# Altium PCB X4M03.PcbDoc
Units mm, origin at the board's own origin, x right, y up, seen from the top; angles counter-clockwise.
Board outline 57.5 x 29.5 mm, 8 copper layers (Top Layer, Inner1, Inner2, Inner3, Inner4, Inner5, Inner6, Bottom Layer), stack 1.684 mm thick; 8 components, 0 nets, 0 pads, 0 vias.
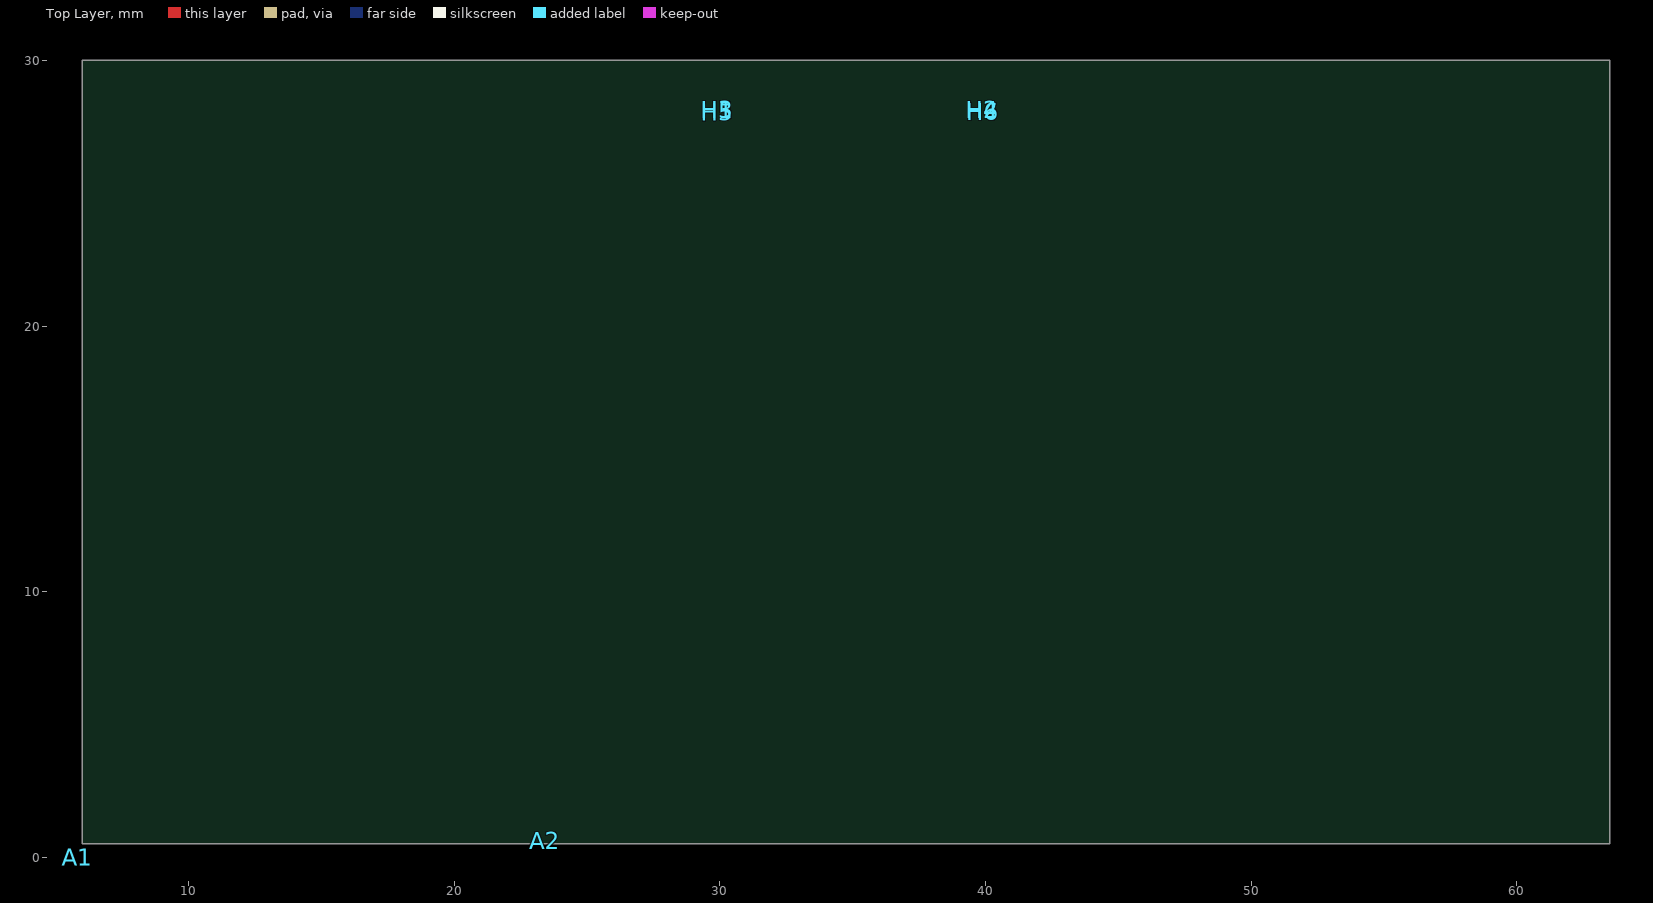
[diagram p0: Top Layer view]
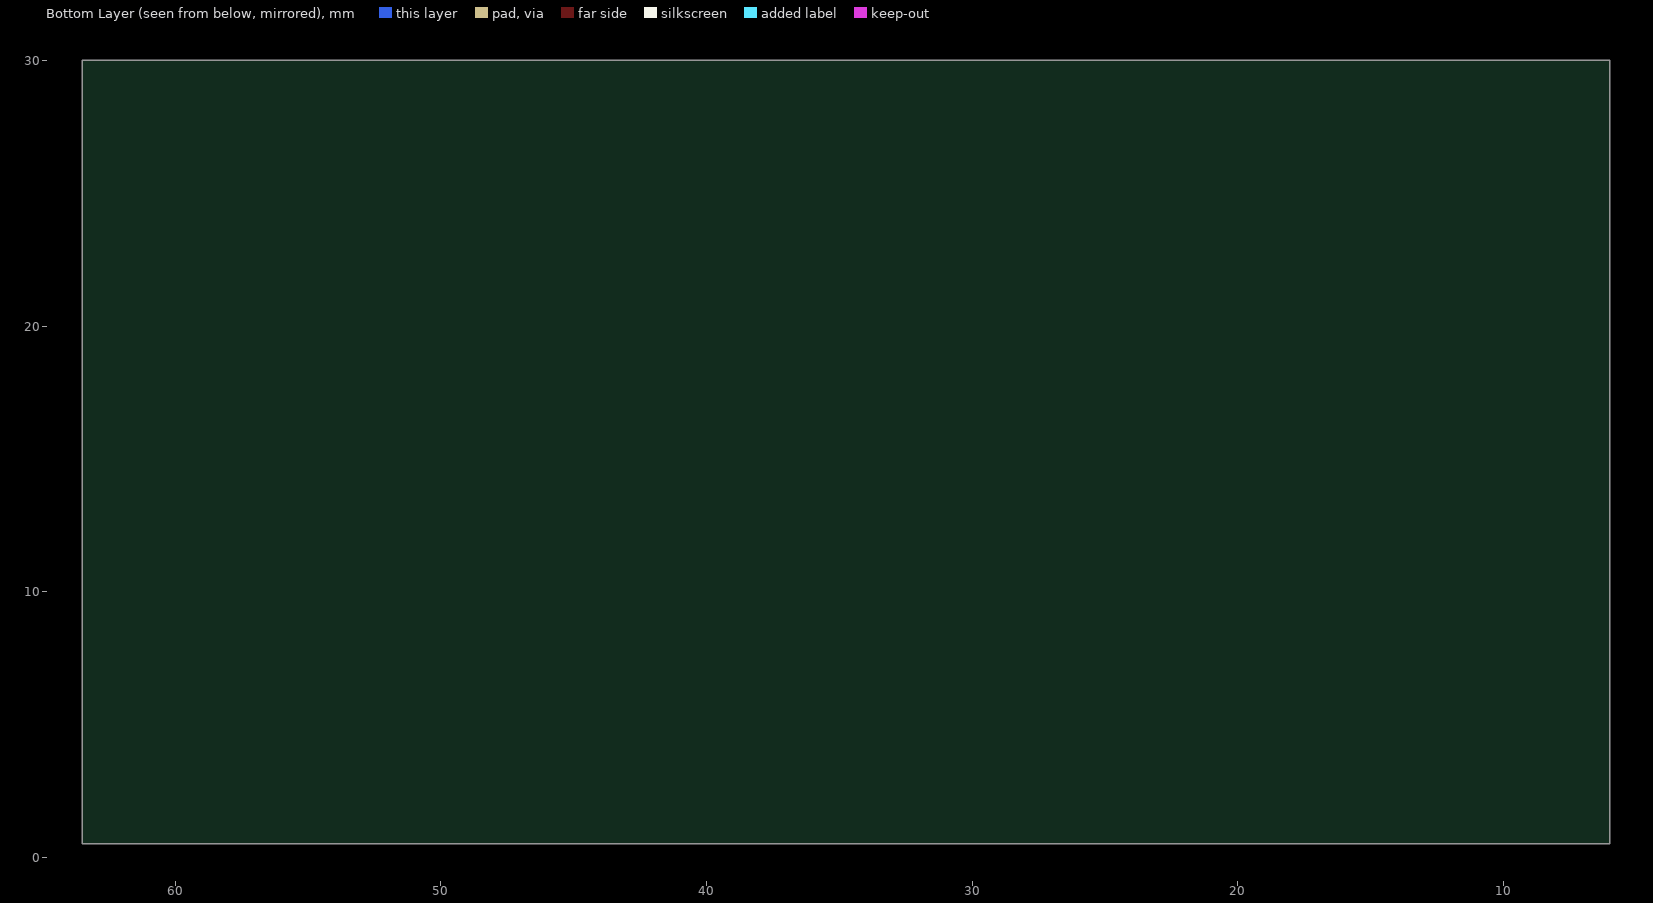
[diagram p1: Bottom Layer view, seen from below]

## Layer stack, top to bottom
Top Solder: solder mask 0.0102, Solder Resist, Dk 3.5
Top Layer: signal copper 0.0356
Dielectric 1: core 0.254, Dk 4.2
Inner1: signal copper 0.036
Dielectric 2: prepreg 0.127, Dk 4.2
Inner2: signal copper 0.036
Dielectric 3: core 0.254, Dk 4.2
Inner3: signal copper 0.036
Dielectric 4: prepreg 0.127, Dk 4.2
Inner4: signal copper 0.036
Dielectric 5: core 0.254, Dk 4.2
Inner5: signal copper 0.036
Dielectric 6: prepreg 0.127, Dk 4.2
Inner6: signal copper 0.036
Dielectric 7: core 0.254, Dk 4.2
Bottom Layer: signal copper 0.0356
Bottom Solder: solder mask 0.0102, Solder Resist, Dk 3.5

## Board outline
6,0.5 63.5,0.5 63.5,30 6,30

## Design rules (kind name [scope] priority, off if disabled: settings)
Clearance Clearance_Blind [HoleSize <= 0.1] p1: gap=0.1 ignorepadtopadclearanceinfootprint=FALSE except(0: Arc-Hole Track-Hole SMDPad-Hole THPad-Hole Via-Hole Fill-Hole Poly-Hole Region-Hole Text-Hole)
Clearance Clearance_ViaHole [IsVia vs OnMid] p2: gap=0.1 ignorepadtopadclearanceinfootprint=FALSE except(0: Arc-Hole Track-Hole SMDPad-Hole THPad-Hole Via-Hole Fill-Hole Poly-Hole Region-Hole Text-Hole; 0.175: Via-Poly)
Clearance Clearance_Wide_Soldermask [SolderMaskExpansion  >= 0.1] p3: gap=0.2 ignorepadtopadclearanceinfootprint=FALSE except(0: Arc-Hole Track-Hole SMDPad-Hole THPad-Hole Via-Hole Fill-Hole Poly-Hole Region-Hole Text-Hole)
Clearance [All] p4: gap=0.1 ignorepadtopadclearanceinfootprint=FALSE except(0: Arc-Hole Track-Hole SMDPad-Hole THPad-Hole Via-Hole Fill-Hole Poly-Hole Region-Hole Text-Hole)
ComponentClearance ComponentClearance_PCBA-PCBA [InComponentClass('All Components') vs InComponentClass('All Components')] p1: gap=0 collisioncheckmode=3 verticalgap=0 showdistances=FALSE
ComponentClearance [All] p2: gap=0.254 collisioncheckmode=3 verticalgap=0.254 showdistances=FALSE
HoleToHoleClearance [All] p1: gap=0.35 allowstackedmicrovias=TRUE
MinimumAnnularRing [Not IsVia] p1: minimumring=0.2
MinimumSolderMaskSliver [All] p1: minsoldermaskwidth=0.08
PlaneConnect [All] p1: planeconnectstyle=Direct reliefexpansion=0.508 reliefentries=4 reliefconductorwidth=0.254 reliefairgap=0.254
PolygonConnect [All] p1: connectstyle=Direct reliefconductorwidth=0.254 reliefentries=4 polygonreliefangle="90 Angle" airgapwidth=0.254
RoutingVias [All] p1: holewidth=0.3 width=0.6 viastyle="Through Hole" minholewidth=0.3 minwidth=0.5 maxholewidth=0.3 maxwidth=0.6
SolderMaskExpansion [All] p1: expansion=0.05
Width [All] p1: maxlimit=0.254 minlimit=0.1 preferedwidth=0.254
26 further rules are at their usual default settings.

## Components (designator, comment, footprint, x,y, rotation, side; value= is the part's Value field where it differs from the comment)
A1 "X4M05 PCBA Rev3" 280040-003 5.8,0 r0 top
A2 "XTMCU02 PCBA Rev4" 280027-004 23.4,0.625 r0 top
H1 "M2.5" 200192 29.9,28.15 r0 top
H2 "M2.5" 200192 39.875,28.15 r0 top
H3 "M2.5 - 16MM + HEAD" 200331 29.9,28.15 r0 top
H4 "M2.5 - 16MM + HEAD" 200331 39.875,28.15 r0 top
H5 "Ø5mm x L6mm" 200332 29.9,28.05 r0 top
H6 "Ø5mm x L6mm" 200332 39.9,28.075 r0 top

## Footprints (in the part's own frame and the unit in brackets; to place one, negate y for a bottom-side part, rotate by r counter-clockwise, add the part's x,y. Pads: shape width x height; smd on the part's side, far side on the other; paste and mask are expansions set on the pad)
200192 [mm]
  body extent -2.75,-3.18 2.75,3.18
200331 [mm]
  body extent -2.25,-2.25 2.25,2.25, height 10.3
200332 [mm]
  body extent -2.5,-2.5 2.5,2.5, height 6.75
280027-004 [mm]
  body extent -2.05,-3.5 26.3,29.7, height 13.78
280040-003 [mm]
  body extent 0,0 58.2,30.4, height 5.28

## Part data
A1: library part 280040-003, Manufacturer=Novelda, ClassName=-, Component Status=New, ItemNo=280040-003, MPN=280040-003, Notes=-
A2: library part 280027-004, Manufacturer=Novelda, ClassName=-, Component Status=Active, ItemNo=280027-004, MPN=280027-004, Notes=-
H1 H2: library part 200192, "HEX NUT, M2.5,  PLASTIC", Manufacturer=--, ClassName=-, Component Category=Misc, Component Status=New, ItemNo=200192, Notes=-, Supplier="Farnell Norge", SupplierCatNo=2494506
H3 H4: library part 200331, "SLOTTED MACHINE SCREW, M2.5, 16MM LENGTH BELOW HEAD, PLASTIC", Manufacturer=--, ClassName=-, Component Category=Misc, Component Status=New, ItemNo=200331, Notes=-, Supplier="Farnell Norge", SupplierCatNo=2472700
H5 H6: library part 200332, "FEMALE SPACER, Ø5MM O/D, 6MM LENGTH, PLASTIC", Manufacturer=--, ClassName=-, Component Category=Misc, Component Status=New, ItemNo=200332, Notes=-, Supplier="Farnell Norge", SupplierCatNo=1651703

## Nets (pads, with @x,y where several pads share a name; then routed paths per layer and width w, separated by ;. In a path a pad name is that pad's centre, name@x,y a point inside that pad or via, vN(x,y) a via of type N, cw(c..) or ccw(c..) an arc to the next point about the centre after c; other vN are vias at no path point)

## Silkscreen, mask and mechanical layers (free items; w line width, h text height)
Board Outline:
  the board outline again, w0.2
Top Designator and Assembly:
  text ".Layer_Name" at 4.25,-10 h1
Bottom Designator and Assembly:
  text ".Layer_Name" at 20.25,-10 h1